# Altium PCB TFT_Adapter_Board_拼版.PcbDoc (part 4 of 9)
Units mm, origin at the board's own origin, x right, y up, seen from the top; angles counter-clockwise.
Board outline 137 x 166.56 mm, 2 copper layers (Top Layer, Bottom Layer); 80 components, 32 nets, 2615 pads, 0 vias.
Unrouted connection lines stored in the file: 1248.
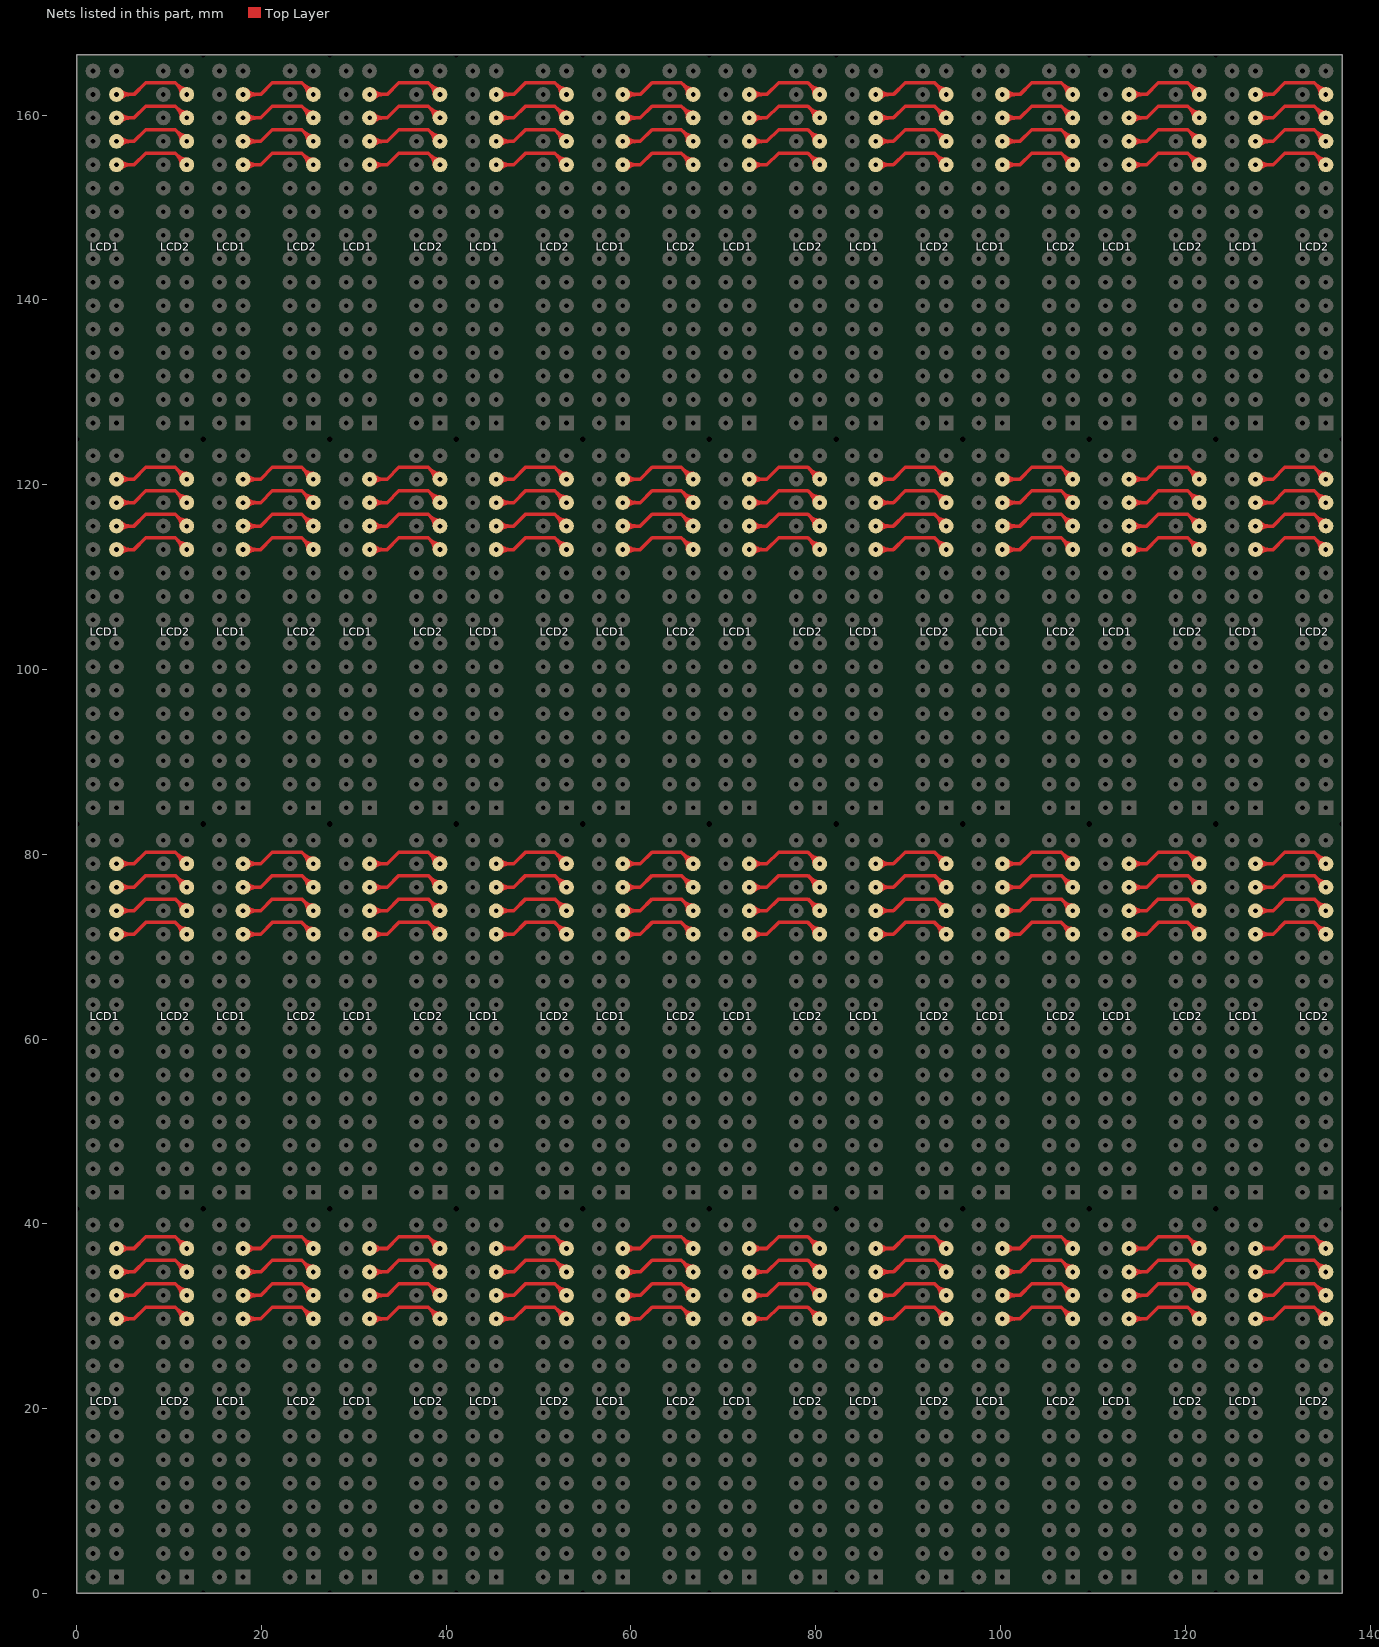
[diagram p4: the nets of this part, all layers, seen from the top]

## Nets (pads, with @x,y where several pads share a name; then routed paths per layer and width w, separated by ;. In a path a pad name is that pad's centre, name@x,y a point inside that pad or via, vN(x,y) a via of type N, cw(c..) or ccw(c..) an arc to the next point about the centre after c; other vN are vias at no path point) (continued)
NetLCD1_12: LCD1.12 LCD2.12 | length 531.8
  Top Layer w0.381: LCD1.12@4.31,29.71 6.215,29.71 7.485,30.98 10.66,30.98 LCD2.12@11.93,29.71 ; LCD1.12@4.31,71.35 6.215,71.35 7.485,72.62 10.66,72.62 LCD2.12@11.93,71.35 ; LCD1.12@4.31,112.99 6.215,112.99 7.485,114.26 10.66,114.26 LCD2.12@11.93,112.99 ; LCD1.12@4.31,154.63 6.215,154.63 7.485,155.9 10.66,155.9 LCD2.12@11.93,154.63 ; LCD1.12@4.741,29.279 cw(c5.781,28.239) 5.781,29.71 cw(c5.781,31.181) LCD1.12@4.741,30.141 ; LCD1.12@4.741,70.919 cw(c5.781,69.879) 5.781,71.35 cw(c5.781,72.821) LCD1.12@4.741,71.781 ; LCD1.12@4.741,112.559 cw(c5.781,111.519) 5.781,112.99 cw(c5.781,114.461) LCD1.12@4.741,113.421 ; LCD1.12@4.741,154.199 cw(c5.781,153.159) 5.781,154.63 cw(c5.781,156.101) LCD1.12@4.741,155.061 ; LCD2.12@11.321,29.71 ccw(c9.849,29.71) 10.89,30.75 ccw(c11.93,31.791) LCD2.12@11.93,30.319 ; LCD2.12@11.321,71.35 ccw(c9.849,71.35) 10.89,72.39 ccw(c11.93,73.431) LCD2.12@11.93,71.959 ; LCD2.12@11.321,112.99 ccw(c9.849,112.99) 10.89,114.03 ccw(c11.93,115.071) LCD2.12@11.93,113.599 ; LCD2.12@11.321,154.63 ccw(c9.849,154.63) 10.89,155.67 ccw(c11.93,156.711) LCD2.12@11.93,155.239 ; LCD1.12@18.01,29.71 19.915,29.71 21.185,30.98 24.36,30.98 LCD2.12@25.63,29.71 ; LCD1.12@18.01,71.35 19.915,71.35 21.185,72.62 24.36,72.62 LCD2.12@25.63,71.35 ; LCD1.12@18.01,112.99 19.915,112.99 21.185,114.26 24.36,114.26 LCD2.12@25.63,112.99 ; LCD1.12@18.01,154.63 19.915,154.63 21.185,155.9 24.36,155.9 LCD2.12@25.63,154.63 ; LCD1.12@18.441,29.279 cw(c19.481,28.239) 19.481,29.71 cw(c19.481,31.181) LCD1.12@18.441,30.141 ; LCD1.12@18.441,70.919 cw(c19.481,69.879) 19.481,71.35 cw(c19.481,72.821) LCD1.12@18.441,71.781 ; LCD1.12@18.441,112.559 cw(c19.481,111.519) 19.481,112.99 cw(c19.481,114.461) LCD1.12@18.441,113.421 ; LCD1.12@18.441,154.199 cw(c19.481,153.159) 19.481,154.63 cw(c19.481,156.101) LCD1.12@18.441,155.061 ; LCD2.12@25.02,29.71 ccw(c23.549,29.71) 24.59,30.75 ccw(c25.63,31.791) LCD2.12@25.63,30.319 ; LCD2.12@25.02,71.35 ccw(c23.549,71.35) 24.59,72.39 ccw(c25.63,73.431) LCD2.12@25.63,71.959 ; LCD2.12@25.02,112.99 ccw(c23.549,112.99) 24.59,114.03 ccw(c25.63,115.071) LCD2.12@25.63,113.599 ; LCD2.12@25.02,154.63 ccw(c23.549,154.63) 24.59,155.67 ccw(c25.63,156.711) LCD2.12@25.63,155.239 ; LCD1.12@31.71,29.71 33.615,29.71 34.885,30.98 38.06,30.98 LCD2.12@39.33,29.71 ; LCD1.12@31.71,71.35 33.615,71.35 34.885,72.62 38.06,72.62 LCD2.12@39.33,71.35 ; LCD1.12@31.71,112.99 33.615,112.99 34.885,114.26 38.06,114.26 LCD2.12@39.33,112.99 ; LCD1.12@31.71,154.63 33.615,154.63 34.885,155.9 38.06,155.9 LCD2.12@39.33,154.63 ; LCD1.12@32.141,29.279 cw(c33.181,28.239) 33.181,29.71 cw(c33.181,31.181) LCD1.12@32.141,30.141 ; LCD1.12@32.141,70.919 cw(c33.181,69.879) 33.181,71.35 cw(c33.181,72.821) LCD1.12@32.141,71.781 ; LCD1.12@32.141,112.559 cw(c33.181,111.519) 33.181,112.99 cw(c33.181,114.461) LCD1.12@32.141,113.421 ; LCD1.12@32.141,154.199 cw(c33.181,153.159) 33.181,154.63 cw(c33.181,156.101) LCD1.12@32.141,155.061 ; LCD2.12@38.72,29.71 ccw(c37.249,29.71) 38.29,30.75 ccw(c39.33,31.791) LCD2.12@39.33,30.319 ; LCD2.12@38.72,71.35 ccw(c37.249,71.35) 38.29,72.39 ccw(c39.33,73.431) LCD2.12@39.33,71.959 ; LCD2.12@38.72,112.99 ccw(c37.249,112.99) 38.29,114.03 ccw(c39.33,115.071) LCD2.12@39.33,113.599 ; LCD2.12@38.72,154.63 ccw(c37.249,154.63) 38.29,155.67 ccw(c39.33,156.711) LCD2.12@39.33,155.239 ; LCD1.12@45.41,29.71 47.315,29.71 48.585,30.98 51.76,30.98 LCD2.12@53.03,29.71 ; LCD1.12@45.41,71.35 47.315,71.35 48.585,72.62 51.76,72.62 LCD2.12@53.03,71.35 ; LCD1.12@45.41,112.99 47.315,112.99 48.585,114.26 51.76,114.26 LCD2.12@53.03,112.99 ; LCD1.12@45.41,154.63 47.315,154.63 48.585,155.9 51.76,155.9 LCD2.12@53.03,154.63 ; LCD1.12@45.841,29.279 cw(c46.881,28.239) 46.881,29.71 cw(c46.881,31.181) LCD1.12@45.841,30.141 ; LCD1.12@45.841,70.919 cw(c46.881,69.879) 46.881,71.35 cw(c46.881,72.821) LCD1.12@45.841,71.781 ; LCD1.12@45.841,112.559 cw(c46.881,111.519) 46.881,112.99 cw(c46.881,114.461) LCD1.12@45.841,113.421 ; LCD1.12@45.841,154.199 cw(c46.881,153.159) 46.881,154.63 cw(c46.881,156.101) LCD1.12@45.841,155.061 ; LCD2.12@52.42,29.71 ccw(c50.949,29.71) 51.99,30.75 ccw(c53.03,31.791) LCD2.12@53.03,30.319 ; LCD2.12@52.42,71.35 ccw(c50.949,71.35) 51.99,72.39 ccw(c53.03,73.431) LCD2.12@53.03,71.959 ; LCD2.12@52.42,112.99 ccw(c50.949,112.99) 51.99,114.03 ccw(c53.03,115.071) LCD2.12@53.03,113.599 ; LCD2.12@52.42,154.63 ccw(c50.949,154.63) 51.99,155.67 ccw(c53.03,156.711) LCD2.12@53.03,155.239 ; LCD1.12@59.11,29.71 61.015,29.71 62.285,30.98 65.46,30.98 LCD2.12@66.73,29.71 ; LCD1.12@59.11,71.35 61.015,71.35 62.285,72.62 65.46,72.62 LCD2.12@66.73,71.35 ; LCD1.12@59.11,112.99 61.015,112.99 62.285,114.26 65.46,114.26 LCD2.12@66.73,112.99 ; LCD1.12@59.11,154.63 61.015,154.63 62.285,155.9 65.46,155.9 LCD2.12@66.73,154.63 ; LCD1.12@59.541,29.279 cw(c60.581,28.239) 60.581,29.71 cw(c60.581,31.181) LCD1.12@59.541,30.141 ; LCD1.12@59.541,70.919 cw(c60.581,69.879) 60.581,71.35 cw(c60.581,72.821) LCD1.12@59.541,71.781 ; LCD1.12@59.541,112.559 cw(c60.581,111.519) 60.581,112.99 cw(c60.581,114.461) LCD1.12@59.541,113.421 ; LCD1.12@59.541,154.199 cw(c60.581,153.159) 60.581,154.63 cw(c60.581,156.101) LCD1.12@59.541,155.061 ; LCD2.12@66.12,29.71 ccw(c64.649,29.71) 65.69,30.75 ccw(c66.73,31.791) LCD2.12@66.73,30.319 ; LCD2.12@66.12,71.35 ccw(c64.649,71.35) 65.69,72.39 ccw(c66.73,73.431) LCD2.12@66.73,71.959 ; LCD2.12@66.12,112.99 ccw(c64.649,112.99) 65.69,114.03 ccw(c66.73,115.071) LCD2.12@66.73,113.599 ; LCD2.12@66.12,154.63 ccw(c64.649,154.63) 65.69,155.67 ccw(c66.73,156.711) LCD2.12@66.73,155.239 ; LCD1.12@72.81,29.71 74.715,29.71 75.985,30.98 79.16,30.98 LCD2.12@80.43,29.71 ; LCD1.12@72.81,71.35 74.715,71.35 75.985,72.62 79.16,72.62 LCD2.12@80.43,71.35 ; LCD1.12@72.81,112.99 74.715,112.99 75.985,114.26 79.16,114.26 LCD2.12@80.43,112.99 ; LCD1.12@72.81,154.63 74.715,154.63 75.985,155.9 79.16,155.9 LCD2.12@80.43,154.63 ; LCD1.12@73.241,29.279 cw(c74.281,28.239) 74.281,29.71 cw(c74.281,31.181) LCD1.12@73.241,30.141 ; LCD1.12@73.241,70.919 cw(c74.281,69.879) 74.281,71.35 cw(c74.281,72.821) LCD1.12@73.241,71.781 ; LCD1.12@73.241,112.559 cw(c74.281,111.519) 74.281,112.99 cw(c74.281,114.461) LCD1.12@73.241,113.421 ; LCD1.12@73.241,154.199 cw(c74.281,153.159) 74.281,154.63 cw(c74.281,156.101) LCD1.12@73.241,155.061 ; LCD2.12@79.82,29.71 ccw(c78.349,29.71) 79.39,30.75 ccw(c80.43,31.791) LCD2.12@80.43,30.319 ; LCD2.12@79.82,71.35 ccw(c78.349,71.35) 79.39,72.39 ccw(c80.43,73.431) LCD2.12@80.43,71.959 ; LCD2.12@79.82,112.99 ccw(c78.349,112.99) 79.39,114.03 ccw(c80.43,115.071) LCD2.12@80.43,113.599 ; LCD2.12@79.82,154.63 ccw(c78.349,154.63) 79.39,155.67 ccw(c80.43,156.711) LCD2.12@80.43,155.239 ; LCD1.12@86.51,29.71 88.415,29.71 89.685,30.98 92.86,30.98 LCD2.12@94.13,29.71 ; LCD1.12@86.51,71.35 88.415,71.35 89.685,72.62 92.86,72.62 LCD2.12@94.13,71.35 ; LCD1.12@86.51,112.99 88.415,112.99 89.685,114.26 92.86,114.26 LCD2.12@94.13,112.99 ; LCD1.12@86.51,154.63 88.415,154.63 89.685,155.9 92.86,155.9 LCD2.12@94.13,154.63 ; LCD1.12@86.941,29.279 cw(c87.981,28.239) 87.981,29.71 cw(c87.981,31.181) LCD1.12@86.941,30.141 ; LCD1.12@86.941,70.919 cw(c87.981,69.879) 87.981,71.35 cw(c87.981,72.821) LCD1.12@86.941,71.781 ; LCD1.12@86.941,112.559 cw(c87.981,111.519) 87.981,112.99 cw(c87.981,114.461) LCD1.12@86.941,113.421 ; LCD1.12@86.941,154.199 cw(c87.981,153.159) 87.981,154.63 cw(c87.981,156.101) LCD1.12@86.941,155.061 ; LCD2.12@93.52,29.71 ccw(c92.049,29.71) 93.09,30.75 ccw(c94.13,31.791) LCD2.12@94.13,30.319 ; LCD2.12@93.52,71.35 ccw(c92.049,71.35) 93.09,72.39 ccw(c94.13,73.431) LCD2.12@94.13,71.959 ; LCD2.12@93.52,112.99 ccw(c92.049,112.99) 93.09,114.03 ccw(c94.13,115.071) LCD2.12@94.13,113.599 ; LCD2.12@93.52,154.63 ccw(c92.049,154.63) 93.09,155.67 ccw(c94.13,156.711) LCD2.12@94.13,155.239 ; LCD1.12@100.21,29.71 102.115,29.71 103.385,30.98 106.56,30.98 LCD2.12@107.83,29.71 ; LCD1.12@100.21,71.35 102.115,71.35 103.385,72.62 106.56,72.62 LCD2.12@107.83,71.35 ; LCD1.12@100.21,112.99 102.115,112.99 103.385,114.26 106.56,114.26 LCD2.12@107.83,112.99 ; LCD1.12@100.21,154.63 102.115,154.63 103.385,155.9 106.56,155.9 LCD2.12@107.83,154.63 ; LCD1.12@100.641,29.279 cw(c101.681,28.239) 101.681,29.71 cw(c101.681,31.181) LCD1.12@100.641,30.141 ; LCD1.12@100.641,70.919 cw(c101.681,69.879) 101.681,71.35 cw(c101.681,72.821) LCD1.12@100.641,71.781 ; LCD1.12@100.641,112.559 cw(c101.681,111.519) 101.681,112.99 cw(c101.681,114.461) LCD1.12@100.641,113.421 ; LCD1.12@100.641,154.199 cw(c101.681,153.159) 101.681,154.63 cw(c101.681,156.101) LCD1.12@100.641,155.061 ; LCD2.12@107.22,29.71 ccw(c105.749,29.71) 106.79,30.75 ccw(c107.83,31.791) LCD2.12@107.83,30.319 ; LCD2.12@107.22,71.35 ccw(c105.749,71.35) 106.79,72.39 ccw(c107.83,73.431) LCD2.12@107.83,71.959 ; LCD2.12@107.22,112.99 ccw(c105.749,112.99) 106.79,114.03 ccw(c107.83,115.071) LCD2.12@107.83,113.599 ; LCD2.12@107.22,154.63 ccw(c105.749,154.63) 106.79,155.67 ccw(c107.83,156.711) LCD2.12@107.83,155.239 ; LCD1.12@113.91,29.71 115.815,29.71 117.085,30.98 120.26,30.98 LCD2.12@121.53,29.71 ; LCD1.12@113.91,71.35 115.815,71.35 117.085,72.62 120.26,72.62 LCD2.12@121.53,71.35 ; LCD1.12@113.91,112.99 115.815,112.99 117.085,114.26 120.26,114.26 LCD2.12@121.53,112.99 ; LCD1.12@113.91,154.63 115.815,154.63 117.085,155.9 120.26,155.9 LCD2.12@121.53,154.63 ; LCD1.12@114.341,29.279 cw(c115.381,28.239) 115.381,29.71 cw(c115.381,31.181) LCD1.12@114.341,30.141 ; LCD1.12@114.341,70.919 cw(c115.381,69.879) 115.381,71.35 cw(c115.381,72.821) LCD1.12@114.341,71.781 ; LCD1.12@114.341,112.559 cw(c115.381,111.519) 115.381,112.99 cw(c115.381,114.461) LCD1.12@114.341,113.421 ; LCD1.12@114.341,154.199 cw(c115.381,153.159) 115.381,154.63 cw(c115.381,156.101) LCD1.12@114.341,155.061 ; LCD2.12@120.92,29.71 ccw(c119.449,29.71) 120.49,30.75 ccw(c121.53,31.791) LCD2.12@121.53,30.319 ; LCD2.12@120.92,71.35 ccw(c119.449,71.35) 120.49,72.39 ccw(c121.53,73.431) LCD2.12@121.53,71.959 ; LCD2.12@120.92,112.99 ccw(c119.449,112.99) 120.49,114.03 ccw(c121.53,115.071) LCD2.12@121.53,113.599 ; LCD2.12@120.92,154.63 ccw(c119.449,154.63) 120.49,155.67 ccw(c121.53,156.711) LCD2.12@121.53,155.239 ; LCD1.12@127.61,29.71 129.515,29.71 130.785,30.98 133.96,30.98 LCD2.12@135.23,29.71 ; LCD1.12@127.61,71.35 129.515,71.35 130.785,72.62 133.96,72.62 LCD2.12@135.23,71.35 ; LCD1.12@127.61,112.99 129.515,112.99 130.785,114.26 133.96,114.26 LCD2.12@135.23,112.99 ; LCD1.12@127.61,154.63 129.515,154.63 130.785,155.9 133.96,155.9 LCD2.12@135.23,154.63 ; LCD1.12@128.041,29.279 cw(c129.081,28.239) 129.081,29.71 cw(c129.081,31.181) LCD1.12@128.041,30.141 ; LCD1.12@128.041,70.919 cw(c129.081,69.879) 129.081,71.35 cw(c129.081,72.821) LCD1.12@128.041,71.781 ; LCD1.12@128.041,112.559 cw(c129.081,111.519) 129.081,112.99 cw(c129.081,114.461) LCD1.12@128.041,113.421 ; LCD1.12@128.041,154.199 cw(c129.081,153.159) 129.081,154.63 cw(c129.081,156.101) LCD1.12@128.041,155.061 ; LCD2.12@134.62,29.71 ccw(c133.149,29.71) 134.19,30.75 ccw(c135.23,31.791) LCD2.12@135.23,30.319 ; LCD2.12@134.62,71.35 ccw(c133.149,71.35) 134.19,72.39 ccw(c135.23,73.431) LCD2.12@135.23,71.959 ; LCD2.12@134.62,112.99 ccw(c133.149,112.99) 134.19,114.03 ccw(c135.23,115.071) LCD2.12@135.23,113.599 ; LCD2.12@134.62,154.63 ccw(c133.149,154.63) 134.19,155.67 ccw(c135.23,156.711) LCD2.12@135.23,155.239
NetLCD1_13: LCD1.13 LCD2.13 | length 531.8
  Top Layer w0.381: LCD1.13@4.31,32.25 6.215,32.25 7.485,33.52 10.66,33.52 LCD2.13@11.93,32.25 ; LCD1.13@4.31,73.89 6.215,73.89 7.485,75.16 10.66,75.16 LCD2.13@11.93,73.89 ; LCD1.13@4.31,115.53 6.215,115.53 7.485,116.8 10.66,116.8 LCD2.13@11.93,115.53 ; LCD1.13@4.31,157.17 6.215,157.17 7.485,158.44 10.66,158.44 LCD2.13@11.93,157.17 ; LCD1.13@4.741,31.819 cw(c5.781,30.779) 5.781,32.25 cw(c5.781,33.721) LCD1.13@4.741,32.681 ; LCD1.13@4.741,73.459 cw(c5.781,72.419) 5.781,73.89 cw(c5.781,75.361) LCD1.13@4.741,74.321 ; LCD1.13@4.741,115.099 cw(c5.781,114.059) 5.781,115.53 cw(c5.781,117.001) LCD1.13@4.741,115.961 ; LCD1.13@4.741,156.739 cw(c5.781,155.699) 5.781,157.17 cw(c5.781,158.641) LCD1.13@4.741,157.601 ; LCD2.13@11.321,32.25 ccw(c9.849,32.25) 10.89,33.29 ccw(c11.93,34.331) LCD2.13@11.93,32.859 ; LCD2.13@11.321,73.89 ccw(c9.849,73.89) 10.89,74.93 ccw(c11.93,75.971) LCD2.13@11.93,74.499 ; LCD2.13@11.321,115.53 ccw(c9.849,115.53) 10.89,116.57 ccw(c11.93,117.611) LCD2.13@11.93,116.139 ; LCD2.13@11.321,157.17 ccw(c9.849,157.17) 10.89,158.21 ccw(c11.93,159.251) LCD2.13@11.93,157.779 ; LCD1.13@18.01,32.25 19.915,32.25 21.185,33.52 24.36,33.52 LCD2.13@25.63,32.25 ; LCD1.13@18.01,73.89 19.915,73.89 21.185,75.16 24.36,75.16 LCD2.13@25.63,73.89 ; LCD1.13@18.01,115.53 19.915,115.53 21.185,116.8 24.36,116.8 LCD2.13@25.63,115.53 ; LCD1.13@18.01,157.17 19.915,157.17 21.185,158.44 24.36,158.44 LCD2.13@25.63,157.17 ; LCD1.13@18.441,31.819 cw(c19.481,30.779) 19.481,32.25 cw(c19.481,33.721) LCD1.13@18.441,32.681 ; LCD1.13@18.441,73.459 cw(c19.481,72.419) 19.481,73.89 cw(c19.481,75.361) LCD1.13@18.441,74.321 ; LCD1.13@18.441,115.099 cw(c19.481,114.059) 19.481,115.53 cw(c19.481,117.001) LCD1.13@18.441,115.961 ; LCD1.13@18.441,156.739 cw(c19.481,155.699) 19.481,157.17 cw(c19.481,158.641) LCD1.13@18.441,157.601 ; LCD2.13@25.02,32.25 ccw(c23.549,32.25) 24.59,33.29 ccw(c25.63,34.331) LCD2.13@25.63,32.859 ; LCD2.13@25.02,73.89 ccw(c23.549,73.89) 24.59,74.93 ccw(c25.63,75.971) LCD2.13@25.63,74.499 ; LCD2.13@25.02,115.53 ccw(c23.549,115.53) 24.59,116.57 ccw(c25.63,117.611) LCD2.13@25.63,116.139 ; LCD2.13@25.02,157.17 ccw(c23.549,157.17) 24.59,158.21 ccw(c25.63,159.251) LCD2.13@25.63,157.779 ; LCD1.13@31.71,32.25 33.615,32.25 34.885,33.52 38.06,33.52 LCD2.13@39.33,32.25 ; LCD1.13@31.71,73.89 33.615,73.89 34.885,75.16 38.06,75.16 LCD2.13@39.33,73.89 ; LCD1.13@31.71,115.53 33.615,115.53 34.885,116.8 38.06,116.8 LCD2.13@39.33,115.53 ; LCD1.13@31.71,157.17 33.615,157.17 34.885,158.44 38.06,158.44 LCD2.13@39.33,157.17 ; LCD1.13@32.141,31.819 cw(c33.181,30.779) 33.181,32.25 cw(c33.181,33.721) LCD1.13@32.141,32.681 ; LCD1.13@32.141,73.459 cw(c33.181,72.419) 33.181,73.89 cw(c33.181,75.361) LCD1.13@32.141,74.321 ; LCD1.13@32.141,115.099 cw(c33.181,114.059) 33.181,115.53 cw(c33.181,117.001) LCD1.13@32.141,115.961 ; LCD1.13@32.141,156.739 cw(c33.181,155.699) 33.181,157.17 cw(c33.181,158.641) LCD1.13@32.141,157.601 ; LCD2.13@38.72,32.25 ccw(c37.249,32.25) 38.29,33.29 ccw(c39.33,34.331) LCD2.13@39.33,32.859 ; LCD2.13@38.72,73.89 ccw(c37.249,73.89) 38.29,74.93 ccw(c39.33,75.971) LCD2.13@39.33,74.499 ; LCD2.13@38.72,115.53 ccw(c37.249,115.53) 38.29,116.57 ccw(c39.33,117.611) LCD2.13@39.33,116.139 ; LCD2.13@38.72,157.17 ccw(c37.249,157.17) 38.29,158.21 ccw(c39.33,159.251) LCD2.13@39.33,157.779 ; LCD1.13@45.41,32.25 47.315,32.25 48.585,33.52 51.76,33.52 LCD2.13@53.03,32.25 ; LCD1.13@45.41,73.89 47.315,73.89 48.585,75.16 51.76,75.16 LCD2.13@53.03,73.89 ; LCD1.13@45.41,115.53 47.315,115.53 48.585,116.8 51.76,116.8 LCD2.13@53.03,115.53 ; LCD1.13@45.41,157.17 47.315,157.17 48.585,158.44 51.76,158.44 LCD2.13@53.03,157.17 ; LCD1.13@45.841,31.819 cw(c46.881,30.779) 46.881,32.25 cw(c46.881,33.721) LCD1.13@45.841,32.681 ; LCD1.13@45.841,73.459 cw(c46.881,72.419) 46.881,73.89 cw(c46.881,75.361) LCD1.13@45.841,74.321 ; LCD1.13@45.841,115.099 cw(c46.881,114.059) 46.881,115.53 cw(c46.881,117.001) LCD1.13@45.841,115.961 ; LCD1.13@45.841,156.739 cw(c46.881,155.699) 46.881,157.17 cw(c46.881,158.641) LCD1.13@45.841,157.601 ; LCD2.13@52.42,32.25 ccw(c50.949,32.25) 51.99,33.29 ccw(c53.03,34.331) LCD2.13@53.03,32.859 ; LCD2.13@52.42,73.89 ccw(c50.949,73.89) 51.99,74.93 ccw(c53.03,75.971) LCD2.13@53.03,74.499 ; LCD2.13@52.42,115.53 ccw(c50.949,115.53) 51.99,116.57 ccw(c53.03,117.611) LCD2.13@53.03,116.139 ; LCD2.13@52.42,157.17 ccw(c50.949,157.17) 51.99,158.21 ccw(c53.03,159.251) LCD2.13@53.03,157.779 ; LCD1.13@59.11,32.25 61.015,32.25 62.285,33.52 65.46,33.52 LCD2.13@66.73,32.25 ; LCD1.13@59.11,73.89 61.015,73.89 62.285,75.16 65.46,75.16 LCD2.13@66.73,73.89 ; LCD1.13@59.11,115.53 61.015,115.53 62.285,116.8 65.46,116.8 LCD2.13@66.73,115.53 ; LCD1.13@59.11,157.17 61.015,157.17 62.285,158.44 65.46,158.44 LCD2.13@66.73,157.17 ; LCD1.13@59.541,31.819 cw(c60.581,30.779) 60.581,32.25 cw(c60.581,33.721) LCD1.13@59.541,32.681 ; LCD1.13@59.541,73.459 cw(c60.581,72.419) 60.581,73.89 cw(c60.581,75.361) LCD1.13@59.541,74.321 ; LCD1.13@59.541,115.099 cw(c60.581,114.059) 60.581,115.53 cw(c60.581,117.001) LCD1.13@59.541,115.961 ; LCD1.13@59.541,156.739 cw(c60.581,155.699) 60.581,157.17 cw(c60.581,158.641) LCD1.13@59.541,157.601 ; LCD2.13@66.12,32.25 ccw(c64.649,32.25) 65.69,33.29 ccw(c66.73,34.331) LCD2.13@66.73,32.859 ; LCD2.13@66.12,73.89 ccw(c64.649,73.89) 65.69,74.93 ccw(c66.73,75.971) LCD2.13@66.73,74.499 ; LCD2.13@66.12,115.53 ccw(c64.649,115.53) 65.69,116.57 ccw(c66.73,117.611) LCD2.13@66.73,116.139 ; LCD2.13@66.12,157.17 ccw(c64.649,157.17) 65.69,158.21 ccw(c66.73,159.251) LCD2.13@66.73,157.779 ; LCD1.13@72.81,32.25 74.715,32.25 75.985,33.52 79.16,33.52 LCD2.13@80.43,32.25 ; LCD1.13@72.81,73.89 74.715,73.89 75.985,75.16 79.16,75.16 LCD2.13@80.43,73.89 ; LCD1.13@72.81,115.53 74.715,115.53 75.985,116.8 79.16,116.8 LCD2.13@80.43,115.53 ; LCD1.13@72.81,157.17 74.715,157.17 75.985,158.44 79.16,158.44 LCD2.13@80.43,157.17 ; LCD1.13@73.241,31.819 cw(c74.281,30.779) 74.281,32.25 cw(c74.281,33.721) LCD1.13@73.241,32.681 ; LCD1.13@73.241,73.459 cw(c74.281,72.419) 74.281,73.89 cw(c74.281,75.361) LCD1.13@73.241,74.321 ; LCD1.13@73.241,115.099 cw(c74.281,114.059) 74.281,115.53 cw(c74.281,117.001) LCD1.13@73.241,115.961 ; LCD1.13@73.241,156.739 cw(c74.281,155.699) 74.281,157.17 cw(c74.281,158.641) LCD1.13@73.241,157.601 ; LCD2.13@79.82,32.25 ccw(c78.349,32.25) 79.39,33.29 ccw(c80.43,34.331) LCD2.13@80.43,32.859 ; LCD2.13@79.82,73.89 ccw(c78.349,73.89) 79.39,74.93 ccw(c80.43,75.971) LCD2.13@80.43,74.499 ; LCD2.13@79.82,115.53 ccw(c78.349,115.53) 79.39,116.57 ccw(c80.43,117.611) LCD2.13@80.43,116.139 ; LCD2.13@79.82,157.17 ccw(c78.349,157.17) 79.39,158.21 ccw(c80.43,159.251) LCD2.13@80.43,157.779 ; LCD1.13@86.51,32.25 88.415,32.25 89.685,33.52 92.86,33.52 LCD2.13@94.13,32.25 ; LCD1.13@86.51,73.89 88.415,73.89 89.685,75.16 92.86,75.16 LCD2.13@94.13,73.89 ; LCD1.13@86.51,115.53 88.415,115.53 89.685,116.8 92.86,116.8 LCD2.13@94.13,115.53 ; LCD1.13@86.51,157.17 88.415,157.17 89.685,158.44 92.86,158.44 LCD2.13@94.13,157.17 ; LCD1.13@86.941,31.819 cw(c87.981,30.779) 87.981,32.25 cw(c87.981,33.721) LCD1.13@86.941,32.681 ; LCD1.13@86.941,73.459 cw(c87.981,72.419) 87.981,73.89 cw(c87.981,75.361) LCD1.13@86.941,74.321 ; LCD1.13@86.941,115.099 cw(c87.981,114.059) 87.981,115.53 cw(c87.981,117.001) LCD1.13@86.941,115.961 ; LCD1.13@86.941,156.739 cw(c87.981,155.699) 87.981,157.17 cw(c87.981,158.641) LCD1.13@86.941,157.601 ; LCD2.13@93.52,32.25 ccw(c92.049,32.25) 93.09,33.29 ccw(c94.13,34.331) LCD2.13@94.13,32.859 ; LCD2.13@93.52,73.89 ccw(c92.049,73.89) 93.09,74.93 ccw(c94.13,75.971) LCD2.13@94.13,74.499 ; LCD2.13@93.52,115.53 ccw(c92.049,115.53) 93.09,116.57 ccw(c94.13,117.611) LCD2.13@94.13,116.139 ; LCD2.13@93.52,157.17 ccw(c92.049,157.17) 93.09,158.21 ccw(c94.13,159.251) LCD2.13@94.13,157.779 ; LCD1.13@100.21,32.25 102.115,32.25 103.385,33.52 106.56,33.52 LCD2.13@107.83,32.25 ; LCD1.13@100.21,73.89 102.115,73.89 103.385,75.16 106.56,75.16 LCD2.13@107.83,73.89 ; LCD1.13@100.21,115.53 102.115,115.53 103.385,116.8 106.56,116.8 LCD2.13@107.83,115.53 ; LCD1.13@100.21,157.17 102.115,157.17 103.385,158.44 106.56,158.44 LCD2.13@107.83,157.17 ; LCD1.13@100.641,31.819 cw(c101.681,30.779) 101.681,32.25 cw(c101.681,33.721) LCD1.13@100.641,32.681 ; LCD1.13@100.641,73.459 cw(c101.681,72.419) 101.681,73.89 cw(c101.681,75.361) LCD1.13@100.641,74.321 ; LCD1.13@100.641,115.099 cw(c101.681,114.059) 101.681,115.53 cw(c101.681,117.001) LCD1.13@100.641,115.961 ; LCD1.13@100.641,156.739 cw(c101.681,155.699) 101.681,157.17 cw(c101.681,158.641) LCD1.13@100.641,157.601 ; LCD2.13@107.22,32.25 ccw(c105.749,32.25) 106.79,33.29 ccw(c107.83,34.331) LCD2.13@107.83,32.859 ; LCD2.13@107.22,73.89 ccw(c105.749,73.89) 106.79,74.93 ccw(c107.83,75.971) LCD2.13@107.83,74.499 ; LCD2.13@107.22,115.53 ccw(c105.749,115.53) 106.79,116.57 ccw(c107.83,117.611) LCD2.13@107.83,116.139 ; LCD2.13@107.22,157.17 ccw(c105.749,157.17) 106.79,158.21 ccw(c107.83,159.251) LCD2.13@107.83,157.779 ; LCD1.13@113.91,32.25 115.815,32.25 117.085,33.52 120.26,33.52 LCD2.13@121.53,32.25 ; LCD1.13@113.91,73.89 115.815,73.89 117.085,75.16 120.26,75.16 LCD2.13@121.53,73.89 ; LCD1.13@113.91,115.53 115.815,115.53 117.085,116.8 120.26,116.8 LCD2.13@121.53,115.53 ; LCD1.13@113.91,157.17 115.815,157.17 117.085,158.44 120.26,158.44 LCD2.13@121.53,157.17 ; LCD1.13@114.341,31.819 cw(c115.381,30.779) 115.381,32.25 cw(c115.381,33.721) LCD1.13@114.341,32.681 ; LCD1.13@114.341,73.459 cw(c115.381,72.419) 115.381,73.89 cw(c115.381,75.361) LCD1.13@114.341,74.321 ; LCD1.13@114.341,115.099 cw(c115.381,114.059) 115.381,115.53 cw(c115.381,117.001) LCD1.13@114.341,115.961 ; LCD1.13@114.341,156.739 cw(c115.381,155.699) 115.381,157.17 cw(c115.381,158.641) LCD1.13@114.341,157.601 ; LCD2.13@120.92,32.25 ccw(c119.449,32.25) 120.49,33.29 ccw(c121.53,34.331) LCD2.13@121.53,32.859 ; LCD2.13@120.92,73.89 ccw(c119.449,73.89) 120.49,74.93 ccw(c121.53,75.971) LCD2.13@121.53,74.499 ; LCD2.13@120.92,115.53 ccw(c119.449,115.53) 120.49,116.57 ccw(c121.53,117.611) LCD2.13@121.53,116.139 ; LCD2.13@120.92,157.17 ccw(c119.449,157.17) 120.49,158.21 ccw(c121.53,159.251) LCD2.13@121.53,157.779 ; LCD1.13@127.61,32.25 129.515,32.25 130.785,33.52 133.96,33.52 LCD2.13@135.23,32.25 ; LCD1.13@127.61,73.89 129.515,73.89 130.785,75.16 133.96,75.16 LCD2.13@135.23,73.89 ; LCD1.13@127.61,115.53 129.515,115.53 130.785,116.8 133.96,116.8 LCD2.13@135.23,115.53 ; LCD1.13@127.61,157.17 129.515,157.17 130.785,158.44 133.96,158.44 LCD2.13@135.23,157.17 ; LCD1.13@128.041,31.819 cw(c129.081,30.779) 129.081,32.25 cw(c129.081,33.721) LCD1.13@128.041,32.681 ; LCD1.13@128.041,73.459 cw(c129.081,72.419) 129.081,73.89 cw(c129.081,75.361) LCD1.13@128.041,74.321 ; LCD1.13@128.041,115.099 cw(c129.081,114.059) 129.081,115.53 cw(c129.081,117.001) LCD1.13@128.041,115.961 ; LCD1.13@128.041,156.739 cw(c129.081,155.699) 129.081,157.17 cw(c129.081,158.641) LCD1.13@128.041,157.601 ; LCD2.13@134.62,32.25 ccw(c133.149,32.25) 134.19,33.29 ccw(c135.23,34.331) LCD2.13@135.23,32.859 ; LCD2.13@134.62,73.89 ccw(c133.149,73.89) 134.19,74.93 ccw(c135.23,75.971) LCD2.13@135.23,74.499 ; LCD2.13@134.62,115.53 ccw(c133.149,115.53) 134.19,116.57 ccw(c135.23,117.611) LCD2.13@135.23,116.139 ; LCD2.13@134.62,157.17 ccw(c133.149,157.17) 134.19,158.21 ccw(c135.23,159.251) LCD2.13@135.23,157.779
NetLCD1_14: LCD1.14 LCD2.14 | length 531.8
  Top Layer w0.381: LCD1.14@4.31,34.79 6.215,34.79 7.485,36.06 10.66,36.06 LCD2.14@11.93,34.79 ; LCD1.14@4.31,76.43 6.215,76.43 7.485,77.7 10.66,77.7 LCD2.14@11.93,76.43 ; LCD1.14@4.31,118.07 6.215,118.07 7.485,119.34 10.66,119.34 LCD2.14@11.93,118.07 ; LCD1.14@4.31,159.71 6.215,159.71 7.485,160.98 10.66,160.98 LCD2.14@11.93,159.71 ; LCD1.14@4.741,34.359 cw(c5.781,33.319) 5.781,34.79 cw(c5.781,36.261) LCD1.14@4.741,35.221 ; LCD1.14@4.741,75.999 cw(c5.781,74.959) 5.781,76.43 cw(c5.781,77.901) LCD1.14@4.741,76.861 ; LCD1.14@4.741,117.639 cw(c5.781,116.599) 5.781,118.07 cw(c5.781,119.541) LCD1.14@4.741,118.501 ; LCD1.14@4.741,159.279 cw(c5.781,158.239) 5.781,159.71 cw(c5.781,161.181) LCD1.14@4.741,160.141 ; LCD2.14@11.321,34.79 ccw(c9.849,34.79) 10.89,35.83 ccw(c11.93,36.871) LCD2.14@11.93,35.399 ; LCD2.14@11.321,76.43 ccw(c9.849,76.43) 10.89,77.47 ccw(c11.93,78.511) LCD2.14@11.93,77.039 ; LCD2.14@11.321,118.07 ccw(c9.849,118.07) 10.89,119.11 ccw(c11.93,120.151) LCD2.14@11.93,118.679 ; LCD2.14@11.321,159.71 ccw(c9.849,159.71) 10.89,160.75 ccw(c11.93,161.791) LCD2.14@11.93,160.319 ; LCD1.14@18.01,34.79 19.915,34.79 21.185,36.06 24.36,36.06 LCD2.14@25.63,34.79 ; LCD1.14@18.01,76.43 19.915,76.43 21.185,77.7 24.36,77.7 LCD2.14@25.63,76.43 ; LCD1.14@18.01,118.07 19.915,118.07 21.185,119.34 24.36,119.34 LCD2.14@25.63,118.07 ; LCD1.14@18.01,159.71 19.915,159.71 21.185,160.98 24.36,160.98 LCD2.14@25.63,159.71 ; LCD1.14@18.441,34.359 cw(c19.481,33.319) 19.481,34.79 cw(c19.481,36.261) LCD1.14@18.441,35.221 ; LCD1.14@18.441,75.999 cw(c19.481,74.959) 19.481,76.43 cw(c19.481,77.901) LCD1.14@18.441,76.861 ; LCD1.14@18.441,117.639 cw(c19.481,116.599) 19.481,118.07 cw(c19.481,119.541) LCD1.14@18.441,118.501 ; LCD1.14@18.441,159.279 cw(c19.481,158.239) 19.481,159.71 cw(c19.481,161.181) LCD1.14@18.441,160.141 ; LCD2.14@25.02,34.79 ccw(c23.549,34.79) 24.59,35.83 ccw(c25.63,36.871) LCD2.14@25.63,35.399 ; LCD2.14@25.02,76.43 ccw(c23.549,76.43) 24.59,77.47 ccw(c25.63,78.511) LCD2.14@25.63,77.039 ; LCD2.14@25.02,118.07 ccw(c23.549,118.07) 24.59,119.11 ccw(c25.63,120.151) LCD2.14@25.63,118.679 ; LCD2.14@25.02,159.71 ccw(c23.549,159.71) 24.59,160.75 ccw(c25.63,161.791) LCD2.14@25.63,160.319 ; LCD1.14@31.71,34.79 33.615,34.79 34.885,36.06 38.06,36.06 LCD2.14@39.33,34.79 ; LCD1.14@31.71,76.43 33.615,76.43 34.885,77.7 38.06,77.7 LCD2.14@39.33,76.43 ; LCD1.14@31.71,118.07 33.615,118.07 34.885,119.34 38.06,119.34 LCD2.14@39.33,118.07 ; LCD1.14@31.71,159.71 33.615,159.71 34.885,160.98 38.06,160.98 LCD2.14@39.33,159.71 ; LCD1.14@32.141,34.359 cw(c33.181,33.319) 33.181,34.79 cw(c33.181,36.261) LCD1.14@32.141,35.221 ; LCD1.14@32.141,75.999 cw(c33.181,74.959) 33.181,76.43 cw(c33.181,77.901) LCD1.14@32.141,76.861 ; LCD1.14@32.141,117.639 cw(c33.181,116.599) 33.181,118.07 cw(c33.181,119.541) LCD1.14@32.141,118.501 ; LCD1.14@32.141,159.279 cw(c33.181,158.239) 33.181,159.71 cw(c33.181,161.181) LCD1.14@32.141,160.141 ; LCD2.14@38.72,34.79 ccw(c37.249,34.79) 38.29,35.83 ccw(c39.33,36.871) LCD2.14@39.33,35.399 ; LCD2.14@38.72,76.43 ccw(c37.249,76.43) 38.29,77.47 ccw(c39.33,78.511) LCD2.14@39.33,77.039 ; LCD2.14@38.72,118.07 ccw(c37.249,118.07) 38.29,119.11 ccw(c39.33,120.151) LCD2.14@39.33,118.679 ; LCD2.14@38.72,159.71 ccw(c37.249,159.71) 38.29,160.75 ccw(c39.33,161.791) LCD2.14@39.33,160.319 ; LCD1.14@45.41,34.79 47.315,34.79 48.585,36.06 51.76,36.06 LCD2.14@53.03,34.79 ; LCD1.14@45.41,76.43 47.315,76.43 48.585,77.7 51.76,77.7 LCD2.14@53.03,76.43 ; LCD1.14@45.41,118.07 47.315,118.07 48.585,119.34 51.76,119.34 LCD2.14@53.03,118.07 ; LCD1.14@45.41,159.71 47.315,159.71 48.585,160.98 51.76,160.98 LCD2.14@53.03,159.71 ; LCD1.14@45.841,34.359 cw(c46.881,33.319) 46.881,34.79 cw(c46.881,36.261) LCD1.14@45.841,35.221 ; LCD1.14@45.841,75.999 cw(c46.881,74.959) 46.881,76.43 cw(c46.881,77.901) LCD1.14@45.841,76.861 ; LCD1.14@45.841,117.639 cw(c46.881,116.599) 46.881,118.07 cw(c46.881,119.541) LCD1.14@45.841,118.501 ; LCD1.14@45.841,159.279 cw(c46.881,158.239) 46.881,159.71 cw(c46.881,161.181) LCD1.14@45.841,160.141 ; LCD2.14@52.42,34.79 ccw(c50.949,34.79) 51.99,35.83 ccw(c53.03,36.871) LCD2.14@53.03,35.399 ; LCD2.14@52.42,76.43 ccw(c50.949,76.43) 51.99,77.47 ccw(c53.03,78.511) LCD2.14@53.03,77.039 ; LCD2.14@52.42,118.07 ccw(c50.949,118.07) 51.99,119.11 ccw(c53.03,120.151) LCD2.14@53.03,118.679 ; LCD2.14@52.42,159.71 ccw(c50.949,159.71) 51.99,160.75 ccw(c53.03,161.791) LCD2.14@53.03,160.319 ; LCD1.14@59.11,34.79 61.015,34.79 62.285,36.06 65.46,36.06 LCD2.14@66.73,34.79 ; LCD1.14@59.11,76.43 61.015,76.43 62.285,77.7 65.46,77.7 LCD2.14@66.73,76.43 ; LCD1.14@59.11,118.07 61.015,118.07 62.285,119.34 65.46,119.34 LCD2.14@66.73,118.07 ; LCD1.14@59.11,159.71 61.015,159.71 62.285,160.98 65.46,160.98 LCD2.14@66.73,159.71 ; LCD1.14@59.541,34.359 cw(c60.581,33.319) 60.581,34.79 cw(c60.581,36.261) LCD1.14@59.541,35.221 ; LCD1.14@59.541,75.999 cw(c60.581,74.959) 60.581,76.43 cw(c60.581,77.901) LCD1.14@59.541,76.861 ; LCD1.14@59.541,117.639 cw(c60.581,116.599) 60.581,118.07 cw(c60.581,119.541) LCD1.14@59.541,118.501 ; LCD1.14@59.541,159.279 cw(c60.581,158.239) 60.581,159.71 cw(c60.581,161.181) LCD1.14@59.541,160.141 ; LCD2.14@66.12,34.79 ccw(c64.649,34.79) 65.69,35.83 ccw(c66.73,36.871) LCD2.14@66.73,35.399 ; LCD2.14@66.12,76.43 ccw(c64.649,76.43) 65.69,77.47 ccw(c66.73,78.511) LCD2.14@66.73,77.039 ; LCD2.14@66.12,118.07 ccw(c64.649,118.07) 65.69,119.11 ccw(c66.73,120.151) LCD2.14@66.73,118.679 ; LCD2.14@66.12,159.71 ccw(c64.649,159.71) 65.69,160.75 ccw(c66.73,161.791) LCD2.14@66.73,160.319 ; LCD1.14@72.81,34.79 74.715,34.79 75.985,36.06 79.16,36.06 LCD2.14@80.43,34.79 ; LCD1.14@72.81,76.43 74.715,76.43 75.985,77.7 79.16,77.7 LCD2.14@80.43,76.43 ; LCD1.14@72.81,118.07 74.715,118.07 75.985,119.34 79.16,119.34 LCD2.14@80.43,118.07 ; LCD1.14@72.81,159.71 74.715,159.71 75.985,160.98 79.16,160.98 LCD2.14@80.43,159.71 ; LCD1.14@73.241,34.359 cw(c74.281,33.319) 74.281,34.79 cw(c74.281,36.261) LCD1.14@73.241,35.221 ; LCD1.14@73.241,75.999 cw(c74.281,74.959) 74.281,76.43 cw(c74.281,77.901) LCD1.14@73.241,76.861 ; LCD1.14@73.241,117.639 cw(c74.281,116.599) 74.281,118.07 cw(c74.281,119.541) LCD1.14@73.241,118.501 ; LCD1.14@73.241,159.279 cw(c74.281,158.239) 74.281,159.71 cw(c74.281,161.181) LCD1.14@73.241,160.141 ; LCD2.14@79.82,34.79 ccw(c78.349,34.79) 79.39,35.83 ccw(c80.43,36.871) LCD2.14@80.43,35.399 ; LCD2.14@79.82,76.43 ccw(c78.349,76.43) 79.39,77.47 ccw(c80.43,78.511) LCD2.14@80.43,77.039 ; LCD2.14@79.82,118.07 ccw(c78.349,118.07) 79.39,119.11 ccw(c80.43,120.151) LCD2.14@80.43,118.679 ; LCD2.14@79.82,159.71 ccw(c78.349,159.71) 79.39,160.75 ccw(c80.43,161.791) LCD2.14@80.43,160.319 ; LCD1.14@86.51,34.79 88.415,34.79 89.685,36.06 92.86,36.06 LCD2.14@94.13,34.79 ; LCD1.14@86.51,76.43 88.415,76.43 89.685,77.7 92.86,77.7 LCD2.14@94.13,76.43 ; LCD1.14@86.51,118.07 88.415,118.07 89.685,119.34 92.86,119.34 LCD2.14@94.13,118.07 ; LCD1.14@86.51,159.71 88.415,159.71 89.685,160.98 92.86,160.98 LCD2.14@94.13,159.71 ; LCD1.14@86.941,34.359 cw(c87.981,33.319) 87.981,34.79 cw(c87.981,36.261) LCD1.14@86.941,35.221 ; LCD1.14@86.941,75.999 cw(c87.981,74.959) 87.981,76.43 cw(c87.981,77.901) LCD1.14@86.941,76.861 ; LCD1.14@86.941,117.639 cw(c87.981,116.599) 87.981,118.07 cw(c87.981,119.541) LCD1.14@86.941,118.501 ; LCD1.14@86.941,159.279 cw(c87.981,158.239) 87.981,159.71 cw(c87.981,161.181) LCD1.14@86.941,160.141 ; LCD2.14@93.52,34.79 ccw(c92.049,34.79) 93.09,35.83 ccw(c94.13,36.871) LCD2.14@94.13,35.399 ; LCD2.14@93.52,76.43 ccw(c92.049,76.43) 93.09,77.47 ccw(c94.13,78.511) LCD2.14@94.13,77.039 ; LCD2.14@93.52,118.07 ccw(c92.049,118.07) 93.09,119.11 ccw(c94.13,120.151) LCD2.14@94.13,118.679 ; LCD2.14@93.52,159.71 ccw(c92.049,159.71) 93.09,160.75 ccw(c94.13,161.791) LCD2.14@94.13,160.319 ; LCD1.14@100.21,34.79 102.115,34.79 103.385,36.06 106.56,36.06 LCD2.14@107.83,34.79 ; LCD1.14@100.21,76.43 102.115,76.43 103.385,77.7 106.56,77.7 LCD2.14@107.83,76.43 ; LCD1.14@100.21,118.07 102.115,118.07 103.385,119.34 106.56,119.34 LCD2.14@107.83,118.07 ; LCD1.14@100.21,159.71 102.115,159.71 103.385,160.98 106.56,160.98 LCD2.14@107.83,159.71 ; LCD1.14@100.641,34.359 cw(c101.681,33.319) 101.681,34.79 cw(c101.681,36.261) LCD1.14@100.641,35.221 ; LCD1.14@100.641,75.999 cw(c101.681,74.959) 101.681,76.43 cw(c101.681,77.901) LCD1.14@100.641,76.861 ; LCD1.14@100.641,117.639 cw(c101.681,116.599) 101.681,118.07 cw(c101.681,119.541) LCD1.14@100.641,118.501 ; LCD1.14@100.641,159.279 cw(c101.681,158.239) 101.681,159.71 cw(c101.681,161.181) LCD1.14@100.641,160.141 ; LCD2.14@107.22,34.79 ccw(c105.749,34.79) 106.79,35.83 ccw(c107.83,36.871) LCD2.14@107.83,35.399 ; LCD2.14@107.22,76.43 ccw(c105.749,76.43) 106.79,77.47 ccw(c107.83,78.511) LCD2.14@107.83,77.039 ; LCD2.14@107.22,118.07 ccw(c105.749,118.07) 106.79,119.11 ccw(c107.83,120.151) LCD2.14@107.83,118.679 ; LCD2.14@107.22,159.71 ccw(c105.749,159.71) 106.79,160.75 ccw(c107.83,161.791) LCD2.14@107.83,160.319 ; LCD1.14@113.91,34.79 115.815,34.79 117.085,36.06 120.26,36.06 LCD2.14@121.53,34.79 ; LCD1.14@113.91,76.43 115.815,76.43 117.085,77.7 120.26,77.7 LCD2.14@121.53,76.43 ; LCD1.14@113.91,118.07 115.815,118.07 117.085,119.34 120.26,119.34 LCD2.14@121.53,118.07 ; LCD1.14@113.91,159.71 115.815,159.71 117.085,160.98 120.26,160.98 LCD2.14@121.53,159.71 ; LCD1.14@114.341,34.359 cw(c115.381,33.319) 115.381,34.79 cw(c115.381,36.261) LCD1.14@114.341,35.221 ; LCD1.14@114.341,75.999 cw(c115.381,74.959) 115.381,76.43 cw(c115.381,77.901) LCD1.14@114.341,76.861 ; LCD1.14@114.341,117.639 cw(c115.381,116.599) 115.381,118.07 cw(c115.381,119.541) LCD1.14@114.341,118.501 ; LCD1.14@114.341,159.279 cw(c115.381,158.239) 115.381,159.71 cw(c115.381,161.181) LCD1.14@114.341,160.141 ; LCD2.14@120.92,34.79 ccw(c119.449,34.79) 120.49,35.83 ccw(c121.53,36.871) LCD2.14@121.53,35.399 ; LCD2.14@120.92,76.43 ccw(c119.449,76.43) 120.49,77.47 ccw(c121.53,78.511) LCD2.14@121.53,77.039 ; LCD2.14@120.92,118.07 ccw(c119.449,118.07) 120.49,119.11 ccw(c121.53,120.151) LCD2.14@121.53,118.679 ; LCD2.14@120.92,159.71 ccw(c119.449,159.71) 120.49,160.75 ccw(c121.53,161.791) LCD2.14@121.53,160.319 ; LCD1.14@127.61,34.79 129.515,34.79 130.785,36.06 133.96,36.06 LCD2.14@135.23,34.79 ; LCD1.14@127.61,76.43 129.515,76.43 130.785,77.7 133.96,77.7 LCD2.14@135.23,76.43 ; LCD1.14@127.61,118.07 129.515,118.07 130.785,119.34 133.96,119.34 LCD2.14@135.23,118.07 ; LCD1.14@127.61,159.71 129.515,159.71 130.785,160.98 133.96,160.98 LCD2.14@135.23,159.71 ; LCD1.14@128.041,34.359 cw(c129.081,33.319) 129.081,34.79 cw(c129.081,36.261) LCD1.14@128.041,35.221 ; LCD1.14@128.041,75.999 cw(c129.081,74.959) 129.081,76.43 cw(c129.081,77.901) LCD1.14@128.041,76.861 ; LCD1.14@128.041,117.639 cw(c129.081,116.599) 129.081,118.07 cw(c129.081,119.541) LCD1.14@128.041,118.501 ; LCD1.14@128.041,159.279 cw(c129.081,158.239) 129.081,159.71 cw(c129.081,161.181) LCD1.14@128.041,160.141 ; LCD2.14@134.62,34.79 ccw(c133.149,34.79) 134.19,35.83 ccw(c135.23,36.871) LCD2.14@135.23,35.399 ; LCD2.14@134.62,76.43 ccw(c133.149,76.43) 134.19,77.47 ccw(c135.23,78.511) LCD2.14@135.23,77.039 ; LCD2.14@134.62,118.07 ccw(c133.149,118.07) 134.19,119.11 ccw(c135.23,120.151) LCD2.14@135.23,118.679 ; LCD2.14@134.62,159.71 ccw(c133.149,159.71) 134.19,160.75 ccw(c135.23,161.791) LCD2.14@135.23,160.319
NetLCD1_15: LCD1.15 LCD2.15 | length 531.8
  Top Layer w0.381: LCD1.15@4.31,37.33 6.215,37.33 7.485,38.6 10.66,38.6 LCD2.15@11.93,37.33 ; LCD1.15@4.31,78.97 6.215,78.97 7.485,80.24 10.66,80.24 LCD2.15@11.93,78.97 ; LCD1.15@4.31,120.61 6.215,120.61 7.485,121.88 10.66,121.88 LCD2.15@11.93,120.61 ; LCD1.15@4.31,162.25 6.215,162.25 7.485,163.52 10.66,163.52 LCD2.15@11.93,162.25 ; LCD1.15@4.741,36.899 cw(c5.781,35.859) 5.781,37.33 cw(c5.781,38.801) LCD1.15@4.741,37.761 ; LCD1.15@4.741,78.539 cw(c5.781,77.499) 5.781,78.97 cw(c5.781,80.441) LCD1.15@4.741,79.401 ; LCD1.15@4.741,120.179 cw(c5.781,119.139) 5.781,120.61 cw(c5.781,122.081) LCD1.15@4.741,121.041 ; LCD1.15@4.741,161.819 cw(c5.781,160.779) 5.781,162.25 cw(c5.781,163.721) LCD1.15@4.741,162.681 ; LCD2.15@11.321,37.33 ccw(c9.849,37.33) 10.89,38.37 ccw(c11.93,39.411) LCD2.15@11.93,37.939 ; LCD2.15@11.321,78.97 ccw(c9.849,78.97) 10.89,80.01 ccw(c11.93,81.051) LCD2.15@11.93,79.579 ; LCD2.15@11.321,120.61 ccw(c9.849,120.61) 10.89,121.65 ccw(c11.93,122.691) LCD2.15@11.93,121.219 ; LCD2.15@11.321,162.25 ccw(c9.849,162.25) 10.89,163.29 ccw(c11.93,164.331) LCD2.15@11.93,162.859 ; LCD1.15@18.01,37.33 19.915,37.33 21.185,38.6 24.36,38.6 LCD2.15@25.63,37.33 ; LCD1.15@18.01,78.97 19.915,78.97 21.185,80.24 24.36,80.24 LCD2.15@25.63,78.97 ; LCD1.15@18.01,120.61 19.915,120.61 21.185,121.88 24.36,121.88 LCD2.15@25.63,120.61 ; LCD1.15@18.01,162.25 19.915,162.25 21.185,163.52 24.36,163.52 LCD2.15@25.63,162.25 ; LCD1.15@18.441,36.899 cw(c19.481,35.859) 19.481,37.33 cw(c19.481,38.801) LCD1.15@18.441,37.761 ; LCD1.15@18.441,78.539 cw(c19.481,77.499) 19.481,78.97 cw(c19.481,80.441) LCD1.15@18.441,79.401 ; LCD1.15@18.441,120.179 cw(c19.481,119.139) 19.481,120.61 cw(c19.481,122.081) LCD1.15@18.441,121.041 ; LCD1.15@18.441,161.819 cw(c19.481,160.779) 19.481,162.25 cw(c19.481,163.721) LCD1.15@18.441,162.681 ; LCD2.15@25.02,37.33 ccw(c23.549,37.33) 24.59,38.37 ccw(c25.63,39.411) LCD2.15@25.63,37.939 ; LCD2.15@25.02,78.97 ccw(c23.549,78.97) 24.59,80.01 ccw(c25.63,81.051) LCD2.15@25.63,79.579 ; LCD2.15@25.02,120.61 ccw(c23.549,120.61) 24.59,121.65 ccw(c25.63,122.691) LCD2.15@25.63,121.219 ; LCD2.15@25.02,162.25 ccw(c23.549,162.25) 24.59,163.29 ccw(c25.63,164.331) LCD2.15@25.63,162.859 ; LCD1.15@31.71,37.33 33.615,37.33 34.885,38.6 38.06,38.6 LCD2.15@39.33,37.33 ; LCD1.15@31.71,78.97 33.615,78.97 34.885,80.24 38.06,80.24 LCD2.15@39.33,78.97 ; LCD1.15@31.71,120.61 33.615,120.61 34.885,121.88 38.06,121.88 LCD2.15@39.33,120.61 ; LCD1.15@31.71,162.25 33.615,162.25 34.885,163.52 38.06,163.52 LCD2.15@39.33,162.25 ; LCD1.15@32.141,36.899 cw(c33.181,35.859) 33.181,37.33 cw(c33.181,38.801) LCD1.15@32.141,37.761 ; LCD1.15@32.141,78.539 cw(c33.181,77.499) 33.181,78.97 cw(c33.181,80.441) LCD1.15@32.141,79.401 ; LCD1.15@32.141,120.179 cw(c33.181,119.139) 33.181,120.61 cw(c33.181,122.081) LCD1.15@32.141,121.041 ; LCD1.15@32.141,161.819 cw(c33.181,160.779) 33.181,162.25 cw(c33.181,163.721) LCD1.15@32.141,162.681 ; LCD2.15@38.72,37.33 ccw(c37.249,37.33) 38.29,38.37 ccw(c39.33,39.411) LCD2.15@39.33,37.939 ; LCD2.15@38.72,78.97 ccw(c37.249,78.97) 38.29,80.01 ccw(c39.33,81.051) LCD2.15@39.33,79.579 ; LCD2.15@38.72,120.61 ccw(c37.249,120.61) 38.29,121.65 ccw(c39.33,122.691) LCD2.15@39.33,121.219 ; LCD2.15@38.72,162.25 ccw(c37.249,162.25) 38.29,163.29 ccw(c39.33,164.331) LCD2.15@39.33,162.859 ; LCD1.15@45.41,37.33 47.315,37.33 48.585,38.6 51.76,38.6 LCD2.15@53.03,37.33 ; LCD1.15@45.41,78.97 47.315,78.97 48.585,80.24 51.76,80.24 LCD2.15@53.03,78.97 ; LCD1.15@45.41,120.61 47.315,120.61 48.585,121.88 51.76,121.88 LCD2.15@53.03,120.61 ; LCD1.15@45.41,162.25 47.315,162.25 48.585,163.52 51.76,163.52 LCD2.15@53.03,162.25 ; LCD1.15@45.841,36.899 cw(c46.881,35.859) 46.881,37.33 cw(c46.881,38.801) LCD1.15@45.841,37.761 ; LCD1.15@45.841,78.539 cw(c46.881,77.499) 46.881,78.97 cw(c46.881,80.441) LCD1.15@45.841,79.401 ; LCD1.15@45.841,120.179 cw(c46.881,119.139) 46.881,120.61 cw(c46.881,122.081) LCD1.15@45.841,121.041 ; LCD1.15@45.841,161.819 cw(c46.881,160.779) 46.881,162.25 cw(c46.881,163.721) LCD1.15@45.841,162.681 ; LCD2.15@52.42,37.33 ccw(c50.949,37.33) 51.99,38.37 ccw(c53.03,39.411) LCD2.15@53.03,37.939 ; LCD2.15@52.42,78.97 ccw(c50.949,78.97) 51.99,80.01 ccw(c53.03,81.051) LCD2.15@53.03,79.579 ; LCD2.15@52.42,120.61 ccw(c50.949,120.61) 51.99,121.65 ccw(c53.03,122.691) LCD2.15@53.03,121.219 ; LCD2.15@52.42,162.25 ccw(c50.949,162.25) 51.99,163.29 ccw(c53.03,164.331) LCD2.15@53.03,162.859 ; LCD1.15@59.11,37.33 61.015,37.33 62.285,38.6 65.46,38.6 LCD2.15@66.73,37.33 ; LCD1.15@59.11,78.97 61.015,78.97 62.285,80.24 65.46,80.24 LCD2.15@66.73,78.97 ; LCD1.15@59.11,120.61 61.015,120.61 62.285,121.88 65.46,121.88 LCD2.15@66.73,120.61 ; LCD1.15@59.11,162.25 61.015,162.25 62.285,163.52 65.46,163.52 LCD2.15@66.73,162.25 ; LCD1.15@59.541,36.899 cw(c60.581,35.859) 60.581,37.33 cw(c60.581,38.801) LCD1.15@59.541,37.761 ; LCD1.15@59.541,78.539 cw(c60.581,77.499) 60.581,78.97 cw(c60.581,80.441) LCD1.15@59.541,79.401 ; LCD1.15@59.541,120.179 cw(c60.581,119.139) 60.581,120.61 cw(c60.581,122.081) LCD1.15@59.541,121.041 ; LCD1.15@59.541,161.819 cw(c60.581,160.779) 60.581,162.25 cw(c60.581,163.721) LCD1.15@59.541,162.681 ; LCD2.15@66.12,37.33 ccw(c64.649,37.33) 65.69,38.37 ccw(c66.73,39.411) LCD2.15@66.73,37.939 ; LCD2.15@66.12,78.97 ccw(c64.649,78.97) 65.69,80.01 ccw(c66.73,81.051) LCD2.15@66.73,79.579 ; LCD2.15@66.12,120.61 ccw(c64.649,120.61) 65.69,121.65 ccw(c66.73,122.691) LCD2.15@66.73,121.219 ; LCD2.15@66.12,162.25 ccw(c64.649,162.25) 65.69,163.29 ccw(c66.73,164.331) LCD2.15@66.73,162.859 ; LCD1.15@72.81,37.33 74.715,37.33 75.985,38.6 79.16,38.6 LCD2.15@80.43,37.33 ; LCD1.15@72.81,78.97 74.715,78.97 75.985,80.24 79.16,80.24 LCD2.15@80.43,78.97 ; LCD1.15@72.81,120.61 74.715,120.61 75.985,121.88 79.16,121.88 LCD2.15@80.43,120.61 ; LCD1.15@72.81,162.25 74.715,162.25 75.985,163.52 79.16,163.52 LCD2.15@80.43,162.25 ; LCD1.15@73.241,36.899 cw(c74.281,35.859) 74.281,37.33 cw(c74.281,38.801) LCD1.15@73.241,37.761 ; LCD1.15@73.241,78.539 cw(c74.281,77.499) 74.281,78.97 cw(c74.281,80.441) LCD1.15@73.241,79.401 ; LCD1.15@73.241,120.179 cw(c74.281,119.139) 74.281,120.61 cw(c74.281,122.081) LCD1.15@73.241,121.041 ; LCD1.15@73.241,161.819 cw(c74.281,160.779) 74.281,162.25 cw(c74.281,163.721) LCD1.15@73.241,162.681 ; LCD2.15@79.82,37.33 ccw(c78.349,37.33) 79.39,38.37 ccw(c80.43,39.411) LCD2.15@80.43,37.939 ; LCD2.15@79.82,78.97 ccw(c78.349,78.97) 79.39,80.01 ccw(c80.43,81.051) LCD2.15@80.43,79.579 ; LCD2.15@79.82,120.61 ccw(c78.349,120.61) 79.39,121.65 ccw(c80.43,122.691) LCD2.15@80.43,121.219 ; LCD2.15@79.82,162.25 ccw(c78.349,162.25) 79.39,163.29 ccw(c80.43,164.331) LCD2.15@80.43,162.859 ; LCD1.15@86.51,37.33 88.415,37.33 89.685,38.6 92.86,38.6 LCD2.15@94.13,37.33 ; LCD1.15@86.51,78.97 88.415,78.97 89.685,80.24 92.86,80.24 LCD2.15@94.13,78.97 ; LCD1.15@86.51,120.61 88.415,120.61 89.685,121.88 92.86,121.88 LCD2.15@94.13,120.61 ; LCD1.15@86.51,162.25 88.415,162.25 89.685,163.52 92.86,163.52 LCD2.15@94.13,162.25 ; LCD1.15@86.941,36.899 cw(c87.981,35.859) 87.981,37.33 cw(c87.981,38.801) LCD1.15@86.941,37.761 ; LCD1.15@86.941,78.539 cw(c87.981,77.499) 87.981,78.97 cw(c87.981,80.441) LCD1.15@86.941,79.401 ; LCD1.15@86.941,120.179 cw(c87.981,119.139) 87.981,120.61 cw(c87.981,122.081) LCD1.15@86.941,121.041 ; LCD1.15@86.941,161.819 cw(c87.981,160.779) 87.981,162.25 cw(c87.981,163.721) LCD1.15@86.941,162.681 ; LCD2.15@93.52,37.33 ccw(c92.049,37.33) 93.09,38.37 ccw(c94.13,39.411) LCD2.15@94.13,37.939 ; LCD2.15@93.52,78.97 ccw(c92.049,78.97) 93.09,80.01 ccw(c94.13,81.051) LCD2.15@94.13,79.579 ; LCD2.15@93.52,120.61 ccw(c92.049,120.61) 93.09,121.65 ccw(c94.13,122.691) LCD2.15@94.13,121.219 ; LCD2.15@93.52,162.25 ccw(c92.049,162.25) 93.09,163.29 ccw(c94.13,164.331) LCD2.15@94.13,162.859 ; LCD1.15@100.21,37.33 102.115,37.33 103.385,38.6 106.56,38.6 LCD2.15@107.83,37.33 ; LCD1.15@100.21,78.97 102.115,78.97 103.385,80.24 106.56,80.24 LCD2.15@107.83,78.97 ; LCD1.15@100.21,120.61 102.115,120.61 103.385,121.88 106.56,121.88 LCD2.15@107.83,120.61 ; LCD1.15@100.21,162.25 102.115,162.25 103.385,163.52 106.56,163.52 LCD2.15@107.83,162.25 ; LCD1.15@100.641,36.899 cw(c101.681,35.859) 101.681,37.33 cw(c101.681,38.801) LCD1.15@100.641,37.761 ; LCD1.15@100.641,78.539 cw(c101.681,77.499) 101.681,78.97 cw(c101.681,80.441) LCD1.15@100.641,79.401 ; LCD1.15@100.641,120.179 cw(c101.681,119.139) 101.681,120.61 cw(c101.681,122.081) LCD1.15@100.641,121.041 ; LCD1.15@100.641,161.819 cw(c101.681,160.779) 101.681,162.25 cw(c101.681,163.721) LCD1.15@100.641,162.681 ; LCD2.15@107.22,37.33 ccw(c105.749,37.33) 106.79,38.37 ccw(c107.83,39.411) LCD2.15@107.83,37.939 ; LCD2.15@107.22,78.97 ccw(c105.749,78.97) 106.79,80.01 ccw(c107.83,81.051) LCD2.15@107.83,79.579 ; LCD2.15@107.22,120.61 ccw(c105.749,120.61) 106.79,121.65 ccw(c107.83,122.691) LCD2.15@107.83,121.219 ; LCD2.15@107.22,162.25 ccw(c105.749,162.25) 106.79,163.29 ccw(c107.83,164.331) LCD2.15@107.83,162.859 ; LCD1.15@113.91,37.33 115.815,37.33 117.085,38.6 120.26,38.6 LCD2.15@121.53,37.33 ; LCD1.15@113.91,78.97 115.815,78.97 117.085,80.24 120.26,80.24 LCD2.15@121.53,78.97 ; LCD1.15@113.91,120.61 115.815,120.61 117.085,121.88 120.26,121.88 LCD2.15@121.53,120.61 ; LCD1.15@113.91,162.25 115.815,162.25 117.085,163.52 120.26,163.52 LCD2.15@121.53,162.25 ; LCD1.15@114.341,36.899 cw(c115.381,35.859) 115.381,37.33 cw(c115.381,38.801) LCD1.15@114.341,37.761 ; LCD1.15@114.341,78.539 cw(c115.381,77.499) 115.381,78.97 cw(c115.381,80.441) LCD1.15@114.341,79.401 ; LCD1.15@114.341,120.179 cw(c115.381,119.139) 115.381,120.61 cw(c115.381,122.081) LCD1.15@114.341,121.041 ; LCD1.15@114.341,161.819 cw(c115.381,160.779) 115.381,162.25 cw(c115.381,163.721) LCD1.15@114.341,162.681 ; LCD2.15@120.92,37.33 ccw(c119.449,37.33) 120.49,38.37 ccw(c121.53,39.411) LCD2.15@121.53,37.939 ; LCD2.15@120.92,78.97 ccw(c119.449,78.97) 120.49,80.01 ccw(c121.53,81.051) LCD2.15@121.53,79.579 ; LCD2.15@120.92,120.61 ccw(c119.449,120.61) 120.49,121.65 ccw(c121.53,122.691) LCD2.15@121.53,121.219 ; LCD2.15@120.92,162.25 ccw(c119.449,162.25) 120.49,163.29 ccw(c121.53,164.331) LCD2.15@121.53,162.859 ; LCD1.15@127.61,37.33 129.515,37.33 130.785,38.6 133.96,38.6 LCD2.15@135.23,37.33 ; LCD1.15@127.61,78.97 129.515,78.97 130.785,80.24 133.96,80.24 LCD2.15@135.23,78.97 ; LCD1.15@127.61,120.61 129.515,120.61 130.785,121.88 133.96,121.88 LCD2.15@135.23,120.61 ; LCD1.15@127.61,162.25 129.515,162.25 130.785,163.52 133.96,163.52 LCD2.15@135.23,162.25 ; LCD1.15@128.041,36.899 cw(c129.081,35.859) 129.081,37.33 cw(c129.081,38.801) LCD1.15@128.041,37.761 ; LCD1.15@128.041,78.539 cw(c129.081,77.499) 129.081,78.97 cw(c129.081,80.441) LCD1.15@128.041,79.401 ; LCD1.15@128.041,120.179 cw(c129.081,119.139) 129.081,120.61 cw(c129.081,122.081) LCD1.15@128.041,121.041 ; LCD1.15@128.041,161.819 cw(c129.081,160.779) 129.081,162.25 cw(c129.081,163.721) LCD1.15@128.041,162.681 ; LCD2.15@134.62,37.33 ccw(c133.149,37.33) 134.19,38.37 ccw(c135.23,39.411) LCD2.15@135.23,37.939 ; LCD2.15@134.62,78.97 ccw(c133.149,78.97) 134.19,80.01 ccw(c135.23,81.051) LCD2.15@135.23,79.579 ; LCD2.15@134.62,120.61 ccw(c133.149,120.61) 134.19,121.65 ccw(c135.23,122.691) LCD2.15@135.23,121.219 ; LCD2.15@134.62,162.25 ccw(c133.149,162.25) 134.19,163.29 ccw(c135.23,164.331) LCD2.15@135.23,162.859